# Altium PCB PCB1.PcbDoc (part 10 of 12)
Units mm, origin at the board's own origin, x right, y up, seen from the top; angles counter-clockwise.
Board outline 100 x 100 mm, 6 copper layers (Top Layer, Int1 (GND), Int2 (Sign), Int3 (Sign), Int4 (PWR), Bottom Layer), stack 1.538 mm thick; 614 components, 712 nets, 3014 pads, 1096 vias.
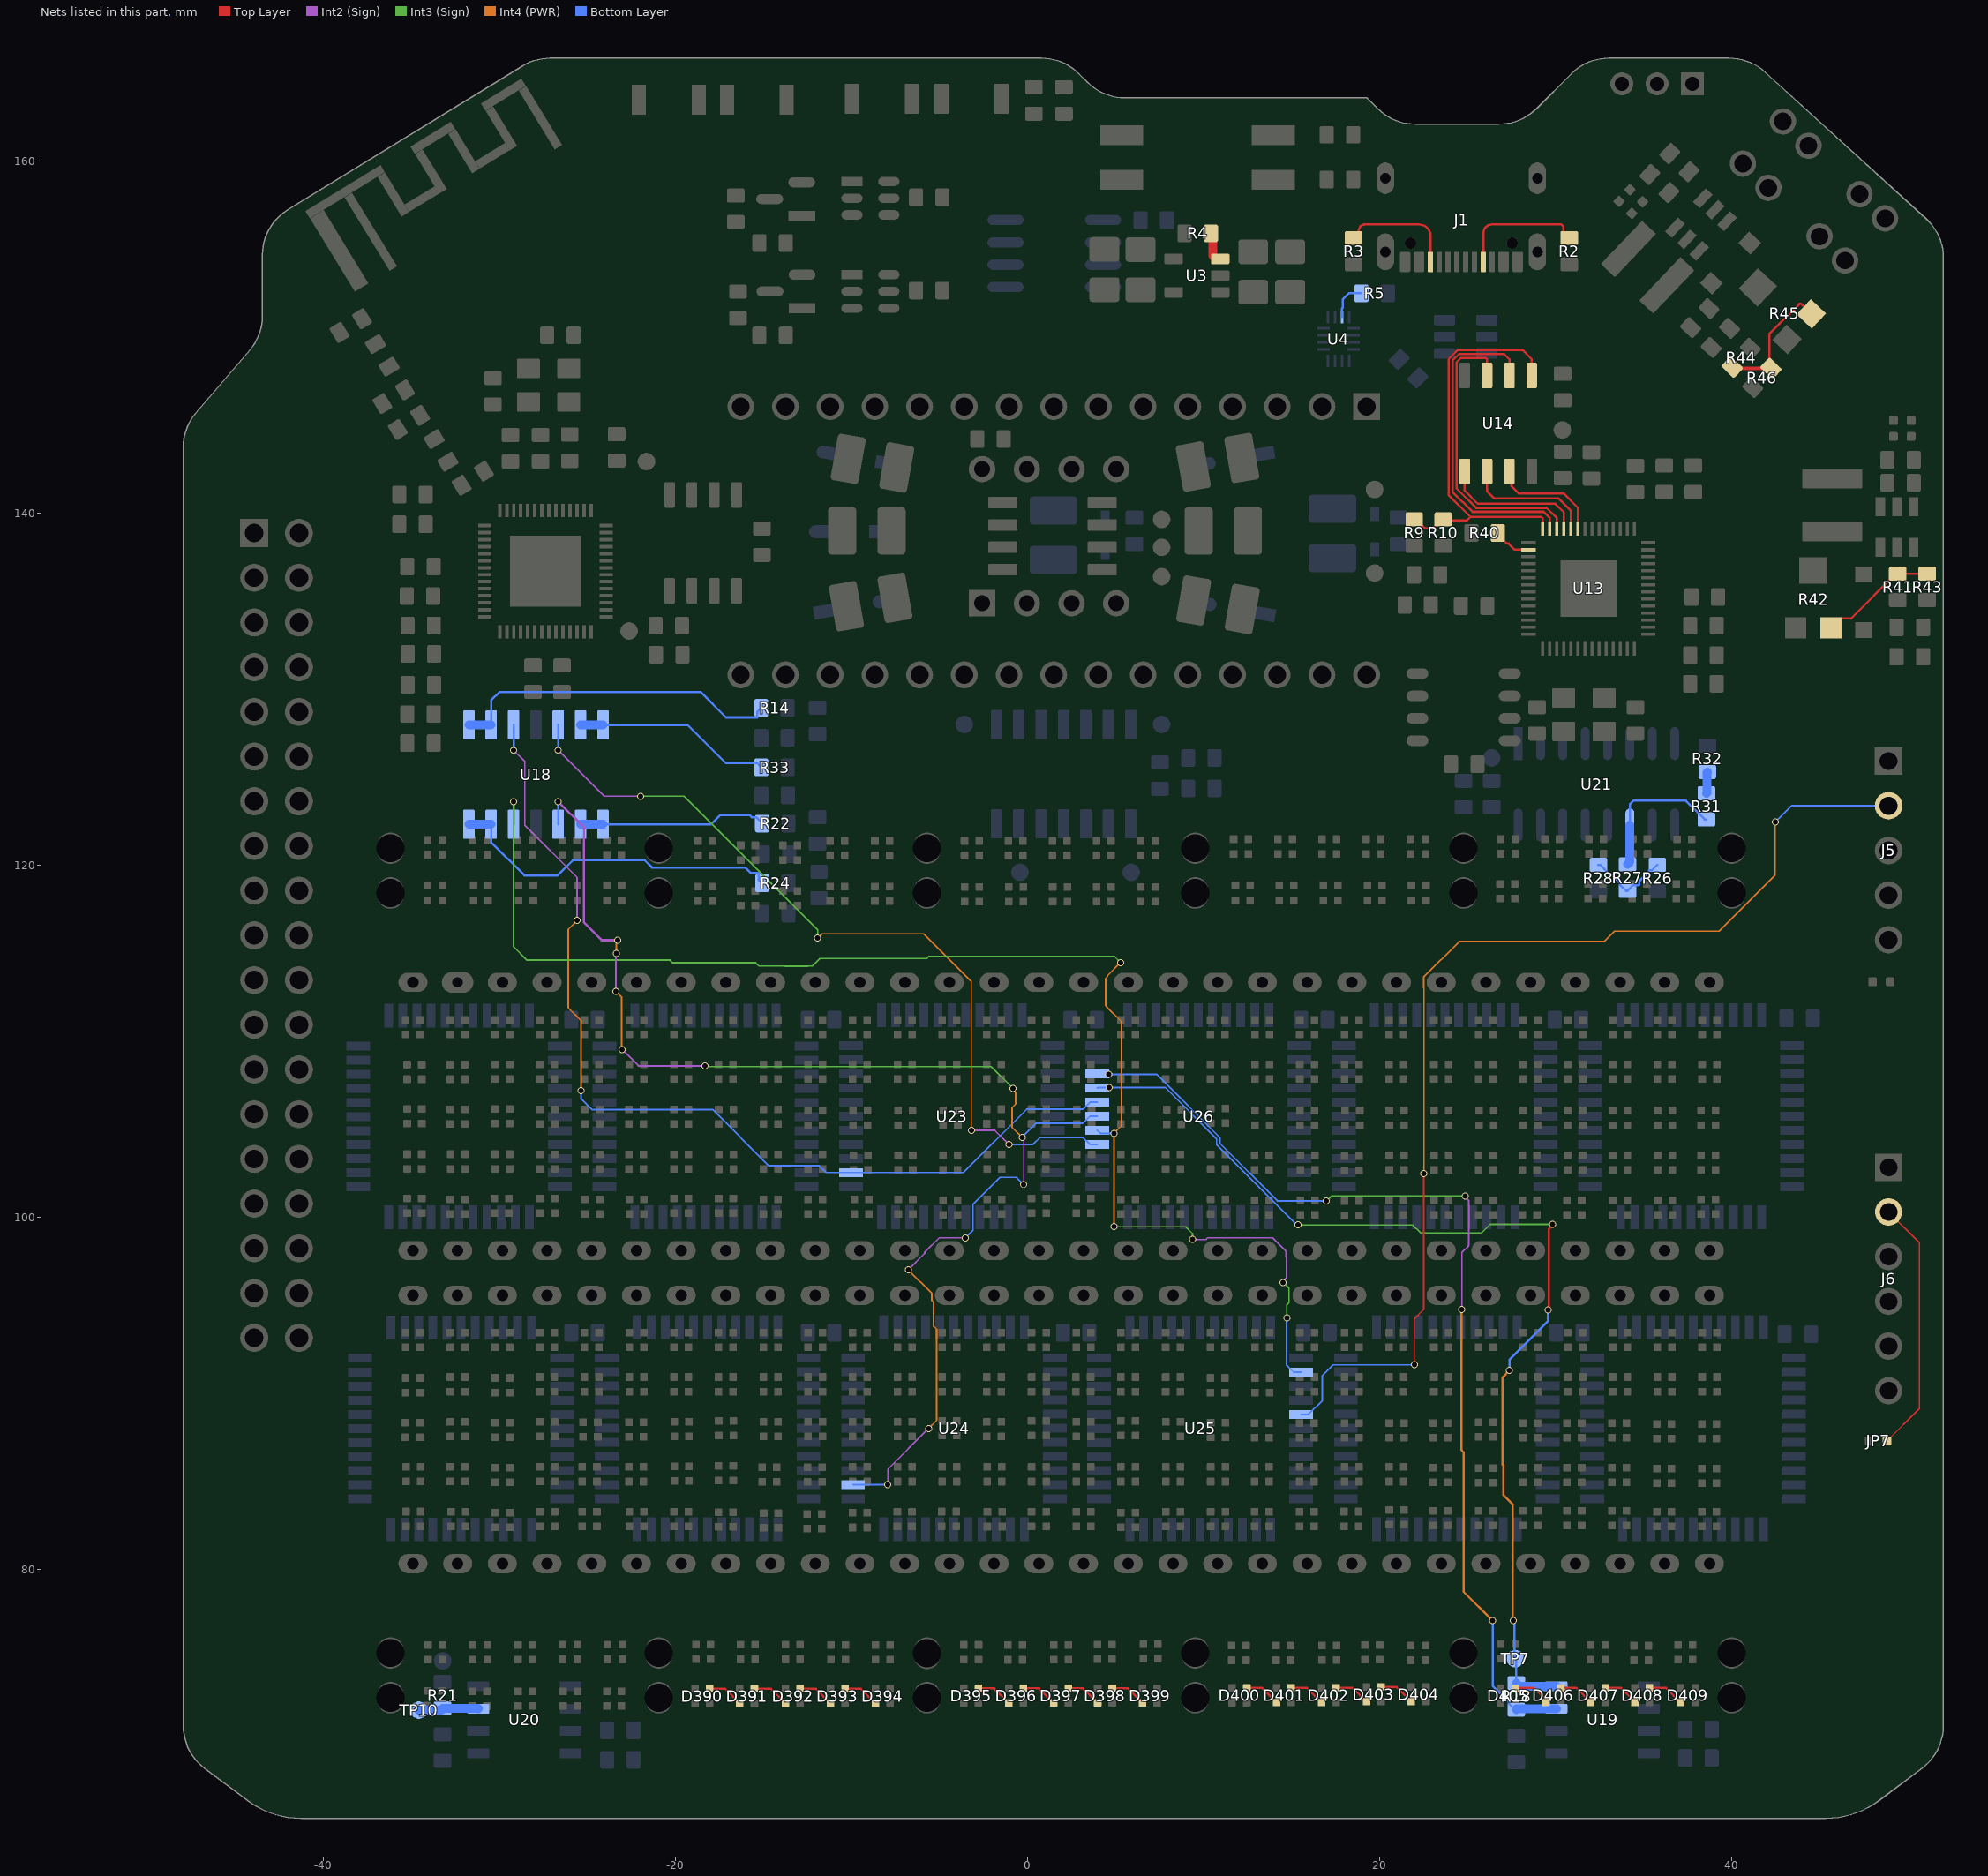
[diagram p13: the nets of this part, all layers, seen from the top]

## Via types
v1: diameter 0.4, hole 0.3, Top Layer to Bottom Layer, tented both sides, 1087 vias
v2: diameter 0.4, hole 0.3, Top Layer to Bottom Layer, 6 vias
v3: diameter 0.4, hole 0.3, Top Layer to Bottom Layer, tented top, 2 vias
v4: diameter 0.6, hole 0.5, Top Layer to Bottom Layer, 1 vias

## Nets (pads, with @x,y where several pads share a name; then routed paths per layer and width w, separated by ;. In a path a pad name is that pad's centre, name@x,y a point inside that pad or via, vN(x,y) a via of type N, cw(c..) or ccw(c..) an arc to the next point about the centre after c; other vN are vias at no path point) (continued)
NetD390_3: D390.4 D391.1 | length 1.9
  Top Layer w0.127: D390.4@-17.88,73.223 -17.19,73.223 D391.1@-16.36,72.393
NetD391_3: D391.4 D392.1 | length 1.9
  Top Layer w0.127: D391.4@-15.33,73.223 -14.59,73.223 D392.1@-13.76,72.393
NetD392_3: D392.4 D393.1 | length 2.1
  Top Layer w0.127: D392.4@-12.93,73.223 -12.04,73.223 D393.1@-11.21,72.393
NetD393_3: D393.4 D394.1 | length 2.1
  Top Layer w0.127: D393.4@-10.38,73.223 -9.49,73.223 D394.1@-8.66,72.393
NetD395_3: D395.4 D396.1 | length 2.1
  Top Layer w0.127: D395.4@-2.8,73.246 -1.91,73.246 D396.1@-1.08,72.416
NetD396_3: D396.4 D397.1 | length 2.1
  Top Layer w0.127: D396.4@-0.25,73.246 0.64,73.246 D397.1@1.47,72.416
NetD397_3: D397.4 D398.1 | length 2
  Top Layer w0.127: D397.4@2.3,73.246 3.14,73.246 D398.1@3.97,72.416
NetD398_3: D398.4 D399.1 | length 2.1
  Top Layer w0.127: D398.4@4.8,73.246 5.69,73.246 D399.1@6.52,72.416
NetD400_3: D400.4 D401.1 | length 2
  Top Layer w0.127: D400.4@12.443,73.266 13.316,73.266 D401.1@14.14,72.443
NetD401_3: D401.4 D402.1 | length 2.1
  Top Layer w0.127: D401.4@14.97,73.273 15.86,73.273 D402.1@16.69,72.443
NetD402_3: D402.4 D403.1 | length 2
  Top Layer w0.127: D402.4@17.52,73.273 18.46,73.273 D403.1@19.24,72.493
NetD403_3: D403.4 D404.1 | length 2.1
  Top Layer w0.127: D403.4@20.07,73.323 20.96,73.323 D404.1@21.79,72.493
NetD405_3: D405.4 D406.1 | length 2.1
  Top Layer w0.127: D405.4@27.87,73.273 28.76,73.273 D406.1@29.59,72.443
NetD406_3: D406.4 D407.1 | length 1.9
  Top Layer w0.127: D406.4@30.42,73.273 31.16,73.273 D407.1@31.99,72.443
NetD407_3: D407.4 D408.1 | length 2.1
  Top Layer w0.127: D407.4@32.82,73.273 33.71,73.273 D408.1@34.54,72.443
NetD408_3: D408.4 D409.1 | length 2.1
  Top Layer w0.127: D408.4@35.37,73.273 36.26,73.273 D409.1@37.09,72.443
NetJ1_A5: J1.A5 R2.1 | length 7.3
  Top Layer w0.127: J1.A5@25.881,154.285 25.881,155.913 cw(c26.381,155.913) 26.381,156.413 30.187,156.413 30.308,156.413 30.394,156.327 30.423,156.298 30.423,155.978 30.757,155.644 R2.1@30.76,155.644
NetJ1_B5: J1.B5 R3.1 | length 7.2
  Top Layer w0.127: R3.1@18.515,155.644 18.805,155.933 18.805,156.06 ; J1.B5@22.881,154.285 22.881,155.762 ccw(c22.23,155.762) 22.23,156.413 19.157,156.413 ; 18.805,156.06 cw(c19.157,156.06) 19.157,156.413 ; 18.805,156.06 cw(c19.157,156.06) 19.157,156.413
NetJ6_2: J6.2 JP7.1 | length 14.5
  Top Layer w0.09: JP7.1@48.815,87.3 50.655,89.14 50.655,98.56 J6.2@48.905,100.31
NetR4_2: R4.2 U3.3 | length 1.8
  Top Layer w0.5: R4.2@10.405,155.908 10.505,155.808 10.505,154.658 10.705,154.458 U3.3@10.93,154.458
NetR5_2: R5.2 U4.15 | length 2.2
  Bottom Layer w0.127: U4.15@17.855,151.152 17.855,151.636 17.902,151.683 17.902,152.163 18.255,152.515 18.941,152.515 R5.2@18.955,152.501
NetR14_1: R14.1 U18.1 U18.2 | length 19.2
  Bottom Layer w0.127: U18.2@-30.485,127.983 -30.485,129.377 -30.004,129.858 -18.599,129.858 -17.149,128.408 -15.379,128.408 -15.379,128.72 R14.1@-15.149,128.95
  Bottom Layer w0.5: U18.1@-31.755,127.983 U18.2@-30.485,127.983
NetR18_1: R18.1 U19.7 U26.31 | length 56.7
  Int2 (Sign) w0.09: v1(24.661,94.76) 24.661,98.005 25.031,98.375 25.031,98.415 25.059,98.444 25.059,100.955 24.844,101.171 v1(24.844,101.213)
  Int3 (Sign) w0.09: v1(16.953,100.942) 17.003,100.942 17.274,101.213 v1(24.844,101.213)
  Int4 (PWR) w0.127: v1(24.661,94.76) 24.63,94.73 24.63,86.788 24.758,86.66 24.758,78.74 v1(26.41,77.088)
  Bottom Layer w0.09: v1(4.609,108.132) 7.324,108.132 10.914,104.542 10.914,104.208 14.18,100.942 v1(16.953,100.942)
  Bottom Layer w0.127: v1(26.41,77.088) 26.41,73.383 27.341,72.452 27.341,72.372 27.674,72.038 R18.1@27.755,72.038
  Bottom Layer w0.5: U19.7@30.03,72.093 R18.1@27.809,72.093 ; R18.1@27.809,72.093 ccw(c27.809,72.038) R18.1@27.755,72.038 cw(c27.809,72.038) R18.1@27.809,72.093
NetR18_2: R18.2 TP7.1 U19.8 U26.30 | length 59.7
  Top Layer w0.127: v1(29.56,94.746) 29.598,94.784 29.598,99.323 29.815,99.54 v1(29.815,99.614)
  Int3 (Sign) w0.09: v1(15.356,99.574) 21.866,99.574 22.326,99.114 25.778,99.114 26.278,99.614 v1(29.815,99.614)
  Int4 (PWR) w0.127: v1(27.36,91.304) 26.972,90.916 26.972,85.967 27.01,85.93 27.01,84.238 27.552,83.696 27.552,77.121 v1(27.585,77.088)
  Bottom Layer w0.09: U26.30@3.952,107.348 3.985,107.381 7.806,107.381 10.724,104.463 10.724,104.129 15.279,99.574 v1(15.356,99.574)
  Bottom Layer w0.127: v1(27.36,91.304) 27.36,91.907 29.56,94.107 v1(29.56,94.746) ; v1(27.585,77.088) 27.637,77.036 27.637,75.048 27.755,74.931 R18.2@27.755,73.538
  Bottom Layer w0.5: R18.2@27.755,73.538 ccw(c27.93,73.538) 27.93,73.363 U19.8@30.03,73.363
  other v1: 4.619,107.381
NetR21_1: R21.1 TP10.1 U20.7 | length 3.6
  Bottom Layer w0.5: TP10.1@-34.595,72.008 R21.1@-33.345,72.008 ; U20.7@-31.22,72.093 -31.22,72.108 R21.1@-33.245,72.108 ; R21.1@-33.345,72.008 ccw(c-33.345,72.108) R21.1@-33.245,72.108 ; R21.1@-33.345,72.008 ccw(c-33.345,72.108) R21.1@-33.245,72.108
NetR22_1: R22.1 U18.8 U18.9 | length 10.7
  Bottom Layer w0.127: U18.8@-24.135,122.333 -17.995,122.333 -17.478,122.85 -15.792,122.85 -15.684,122.742 -15.428,122.742 -15.094,122.408 R22.1@-15.094,122.376
  Bottom Layer w0.5: U18.9@-25.405,122.333 U18.8@-24.135,122.333
NetR24_1: R24.1 U18.13 U18.14 | length 19.6
  Bottom Layer w0.127: U18.13@-30.485,122.333 -30.485,121.317 -28.592,119.424 -26.714,119.424 -25.84,120.298 -21.765,120.298 -21.351,119.884 -16.049,119.884 -15.73,119.565 -15.296,119.565 -15.296,119.192 R24.1@-15.091,118.987
  Bottom Layer w0.5: U18.14@-31.755,122.333 U18.13@-30.485,122.333
NetR26_1: R26.1 R27.2 R28.2 | length 4.8
  Bottom Layer w0.127: R28.2@32.42,120.029 32.52,120.029 33.027,119.522 33.114,119.522 33.654,118.983 33.654,118.892 33.987,118.558 R27.2@34.068,118.558 34.382,118.872 34.724,118.872 34.748,118.896 34.748,119.101 35.291,119.644 35.291,119.724 35.463,119.724 R26.1@35.769,120.029
NetR27_1: R27.1 R31.2 U21.11 | length 8.3
  Bottom Layer w0.127: U21.11@34.21,122.292 34.21,123.475 34.41,123.675 37.387,123.675 38.455,122.608 R31.2@38.555,122.608
  Bottom Layer w0.5: R27.1@34.068,120.058 34.209,120.2 U21.11@34.21,122.292
NetR31_1: R31.1 R32.2 | length 1.2
  Bottom Layer w0.5: R31.1@38.555,124.108 38.58,124.133 38.58,125.283 R32.2@38.605,125.308
NetR33_1: R33.1 U18.6 U18.7 | length 11.3
  Bottom Layer w0.127: U18.7@-24.135,127.983 -19.329,127.983 -17.149,125.803 -15.368,125.803 R33.1@-15.139,125.574
  Bottom Layer w0.5: U18.6@-25.405,127.983 U18.7@-24.135,127.983
NetR40_2: R40.2 U13.2 | length 2.2
  Top Layer w0.127: R40.2@26.704,138.887 26.704,138.807 27.219,138.291 27.309,138.291 27.666,137.935 U13.2@28.453,137.935
NetR41_1: R41.1 R42.3 R43.2 | length 6.7
  Top Layer w0.127: R42.3@45.637,133.5 46.174,134.036 46.788,134.036 49.326,136.575 R41.1@49.426,136.575 ; R41.1@49.426,136.575 R43.2@51.098,136.574
NetR44_1: R44.1 R45.3 R46.2 | length 7.6
  Top Layer w0.127: R46.2@42.223,148.24 42.131,148.332 42.131,150.188 43.844,151.901 43.949,151.901 R45.3@44.519,151.331
  Top Layer w0.2: R44.1@40.018,148.299 40.087,148.23 41.66,148.23 41.727,148.297 42.165,148.297 R46.2@42.223,148.24
NetU18_3: U18.3 U23.24 U26.29 | length 56
  Int2 (Sign) w0.09: v1(-29.215,126.541) -28.583,125.909 -28.583,122.286 -25.605,119.308 v1(-25.605,116.871)
  Int4 (PWR) w0.09: v1(-25.605,116.871) -26.11,116.366 -26.11,111.911 -25.378,111.178 v1(-25.378,107.197)
  Bottom Layer w0.09: v1(-25.378,107.197) -25.378,106.733 -24.773,106.128 -17.904,106.128 -14.714,102.938 -11.853,102.938 -11.463,102.548 -3.659,102.548 -0.064,106.143 3.122,106.143 3.527,106.548 U26.29@3.952,106.548
  Bottom Layer w0.127: v1(-29.215,126.541) U18.3@-29.215,127.983
NetU18_5: U18.5 U26.26 | length 47.1
  Int2 (Sign) w0.09: v1(-26.675,126.541) -24.067,123.932 v1(-22.008,123.932) ; v1(-3.208,104.947) -1.873,104.947 v1(-1.073,104.148)
  Int3 (Sign) w0.09: v1(-22.008,123.932) -19.533,123.932 -11.935,116.335 v1(-11.935,115.878)
  Int4 (PWR) w0.09: v1(-11.935,115.878) -11.924,115.878 -11.693,116.109 -5.909,116.109 -3.208,113.407 v1(-3.208,104.947)
  Bottom Layer w0.09: v1(-1.073,104.148) 0.292,104.148 0.687,104.543 3.132,104.543 3.527,104.148 U26.26@3.952,104.148
  Bottom Layer w0.127: v1(-26.675,126.541) U18.5@-26.675,127.983
NetU18_10: U18.10 U24.24 U26.28 | length 77
  Int2 (Sign) w0.09: v1(-23.406,112.846) -23.406,114.978 v1(-23.379,115.005) ; v1(-23.046,109.536) -22.121,108.611 v1(-18.336,108.611) ; v1(-7.949,84.823) -7.949,85.697 v1(-5.634,88.011) ; v1(-6.79,97.022) -5.858,97.954 -5.858,98.007 -5.026,98.838 -3.547,98.838 v1(-3.542,98.832) ; v1(-0.324,104.551) -0.324,104.467 -0.228,104.371 -0.228,101.896 v1(-0.25,101.875)
  Int2 (Sign) w0.127: v1(-26.675,123.622) -25.215,122.162 -25.215,116.756 -24.208,115.749 v1(-23.292,115.749)
  Int3 (Sign) w0.09: v1(-18.336,108.611) -18.293,108.568 -2.078,108.568 v1(-0.837,107.327)
  Int4 (PWR) w0.09: v1(-23.406,112.846) -23.082,112.522 -23.082,109.573 v1(-23.046,109.536) ; v1(-23.379,115.005) -23.379,115.579 v1@-23.292,115.666 ; v1(-6.79,97.022) -5.449,95.681 -5.449,95.277 -5.354,95.182 -5.354,94.517 -5.368,94.504 -5.368,93.839 -5.18,93.651 -5.18,88.466 v1(-5.634,88.011) ; v1(-0.837,107.327) -0.837,107.243 -0.691,107.097 -0.691,106.436 -0.891,106.235 -0.891,105.118 v1(-0.324,104.551)
  Bottom Layer w0.09: U24.24@-9.93,84.823 v1(-7.949,84.823) ; v1(-3.542,98.832) -3.108,99.266 -3.108,100.748 -1.579,102.276 -0.651,102.276 v1(-0.25,101.875) ; v1(-0.324,104.551) 0.478,105.353 3.132,105.353 3.527,105.748 U26.28@3.952,105.748
  Bottom Layer w0.127: U18.10@-26.675,122.333 v1(-26.675,123.622)
NetU18_12: U18.12 U25.2 U26.27 | length 80.1
  Int2 (Sign) w0.09: v1(9.36,98.744) 10.12,98.744 10.214,98.838 13.902,98.838 14.681,98.059 14.681,97.783 14.695,97.769 14.695,96.571 14.508,96.385 v1(14.508,96.301)
  Int3 (Sign) w0.09: v1(-29.215,123.622) -29.215,115.391 -28.442,114.618 -20.325,114.618 -20.173,114.466 -15.46,114.466 -15.282,114.288 -13.826,114.288 -13.804,114.266 -12.505,114.266 -12.483,114.288 -12.233,114.288 -11.812,114.709 -5.741,114.709 -5.63,114.82 4.922,114.82 v1(5.266,114.476) ; v1(4.903,99.471) 8.972,99.471 9.36,99.082 v1(9.36,98.744) ; v1(14.508,96.301) 14.834,95.976 14.834,95.157 14.715,95.039 v1(14.715,94.304)
  Int4 (PWR) w0.09: v1(4.903,99.471) 4.898,99.476 4.898,104.769 v1(4.894,104.774) 5.326,105.205 5.326,111.124 4.491,111.959 4.491,111.966 4.423,112.035 4.423,113.579 4.521,113.677 4.521,113.734 5.263,114.476 v1(5.266,114.476)
  Bottom Layer w0.09: U26.27@3.952,104.948 4.126,104.774 v1(4.894,104.774) ; v1(14.715,94.304) 14.694,94.282 14.694,91.614 15.1,91.208 U25.2@15.525,91.208
  Bottom Layer w0.127: U18.12@-29.215,122.333 v1(-29.215,123.622)
OSC_PROBE_1: J5.2 U25.5 | length 62.9
  Top Layer w0.09: v1(21.96,91.635) 21.96,94.24 22.491,94.771 22.491,102.477 v1(22.506,102.492)
  Int4 (PWR) w0.09: v1(22.506,102.492) 22.506,113.042 22.491,113.057 22.491,113.655 24.504,115.668 32.741,115.668 33.338,116.265 39.281,116.265 42.465,119.449 v1(42.465,122.46)
  Bottom Layer w0.09: U25.5@15.525,88.808 15.95,88.808 16.735,89.593 16.735,91.018 17.345,91.628 21.953,91.628 v1(21.96,91.635) ; v1(42.465,122.46) 43.395,123.39 J5.2@48.905,123.39
QSPI_SCLK_5: U13.52 U14.6 | length 7.4
  Top Layer w0.127: U14.6@26.095,142.385 26.095,141.245 26.482,140.858 30.142,140.858 30.857,140.143 U13.52@30.857,139.138
QSPI_SD1_5: U13.55 U14.2 | length 18.6
  Top Layer w0.127: U14.2@27.365,147.835 27.365,148.751 27.064,149.052 24.509,149.052 24.134,148.678 24.134,141.223 25.269,140.089 29.303,140.089 29.657,139.735 U13.55@29.657,139.138
QSPI_SD2_5: U13.54 U14.3 | length 16.9
  Top Layer w0.127: U14.3@26.095,147.835 26.095,148.75 26.021,148.825 24.603,148.825 24.361,148.584 24.361,141.427 25.473,140.316 29.476,140.316 30.057,139.735 U13.54@30.057,139.138
QSPI_SD3_5: U13.51 U14.7 | length 6.4
  Top Layer w0.127: U14.7@27.365,142.385 27.484,142.266 27.484,141.544 27.91,141.118 30.457,141.118 31.257,140.318 U13.51@31.257,139.138
QSPI_SDO_5: U13.53 U14.5 | length 8.2
  Top Layer w0.127: U14.5@24.825,142.385 24.825,141.285 25.567,140.543 29.967,140.543 30.457,140.053 U13.53@30.457,139.138
QSPI_SS_5: R9.1 R10.1 U13.56 U14.1 | length 24
  Top Layer w0.127: R9.1@21.957,139.656 22.057,139.656 22.562,139.15 22.992,139.15 23.498,139.656 R10.1@23.598,139.656 23.65,139.603 24.944,139.603 25.142,139.802 ; U14.1@28.635,147.835 28.635,148.751 28.107,149.279 24.415,149.279 23.907,148.772 23.907,141.036 25.142,139.802 ; U13.56@29.257,139.138 29.257,139.727 29.182,139.802 25.142,139.802